# Altium PCB COF.PcbDoc (part 1 of 5)
Units mm, origin at the board's own origin, x right, y up, seen from the top; angles counter-clockwise.
Board outline 42.1 x 32.68 mm, 2 copper layers (TOP, BOTTOM), stack 0.321 mm thick; 42 components, 54 nets, 189 pads, 156 vias.
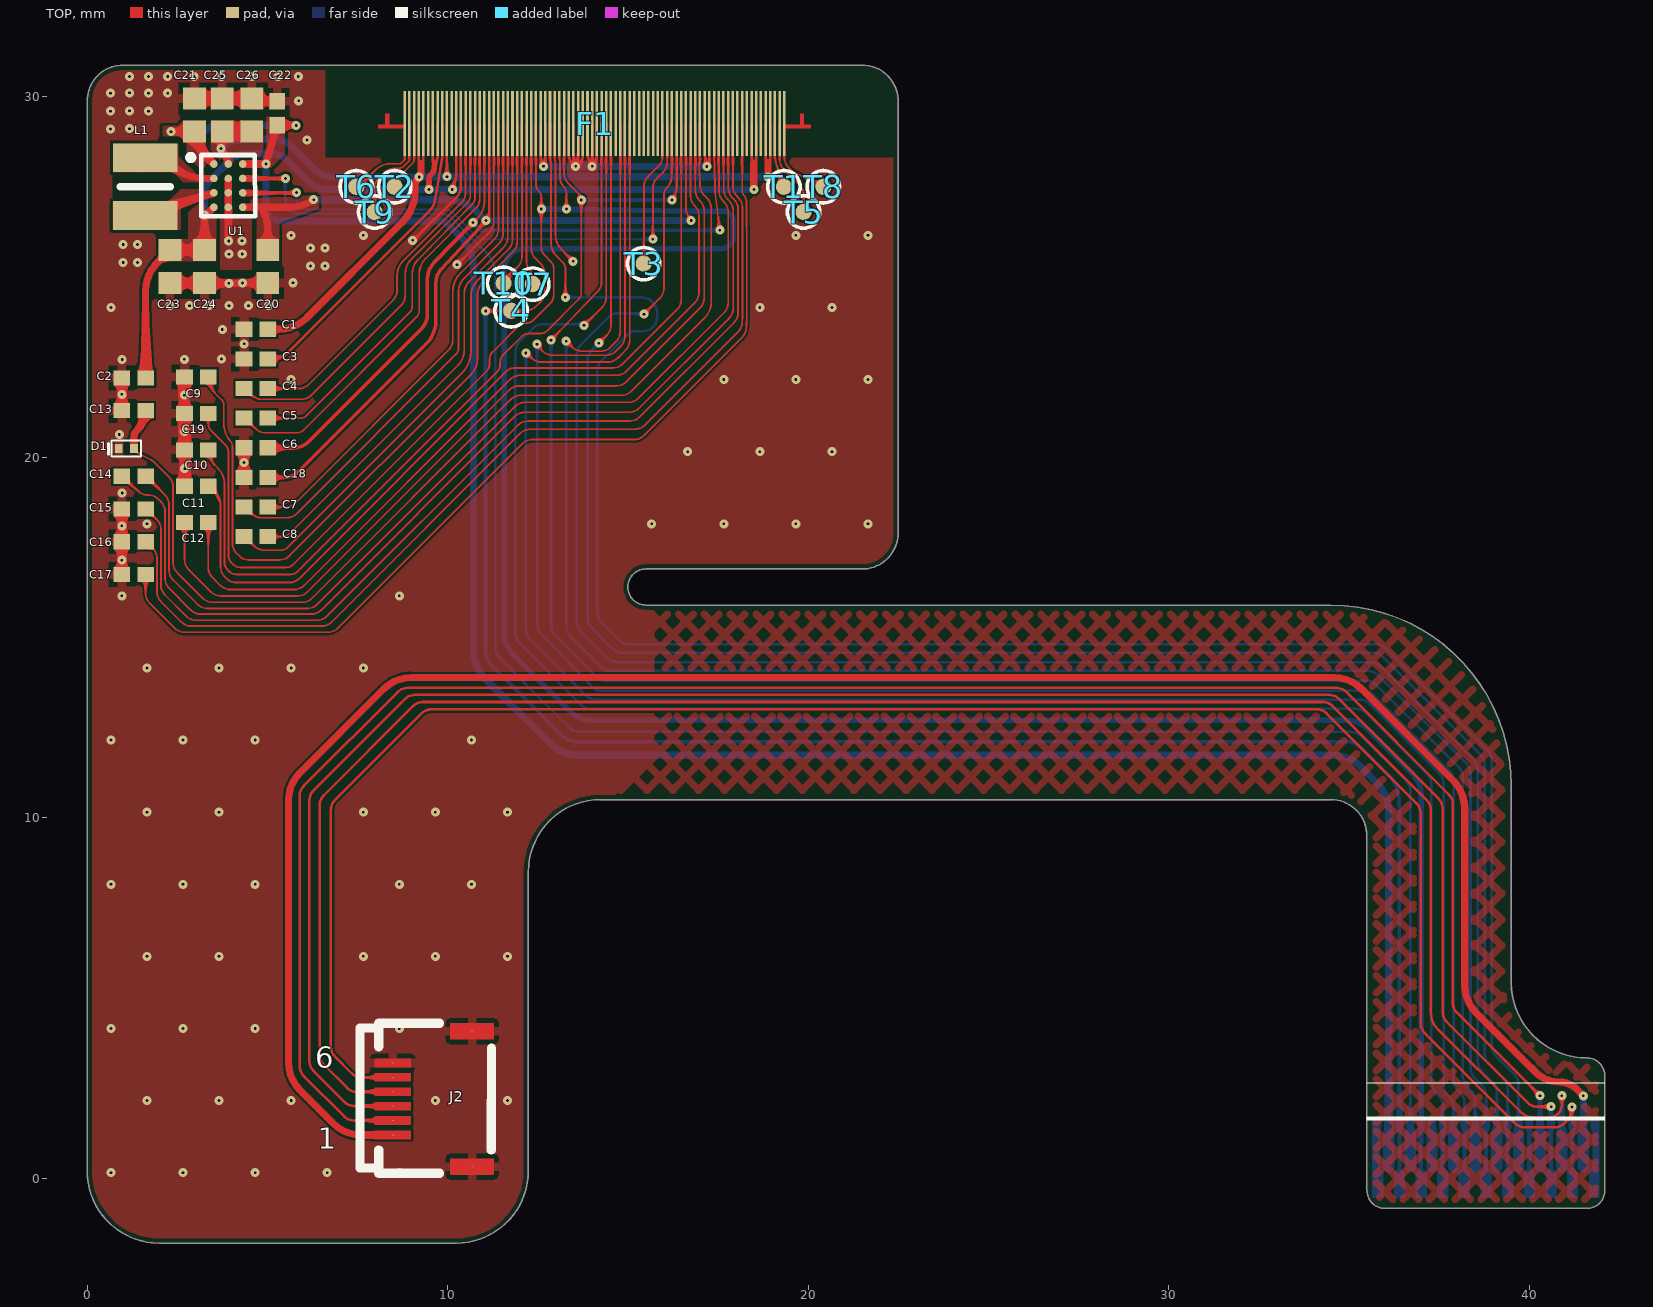
[diagram p0: TOP view]
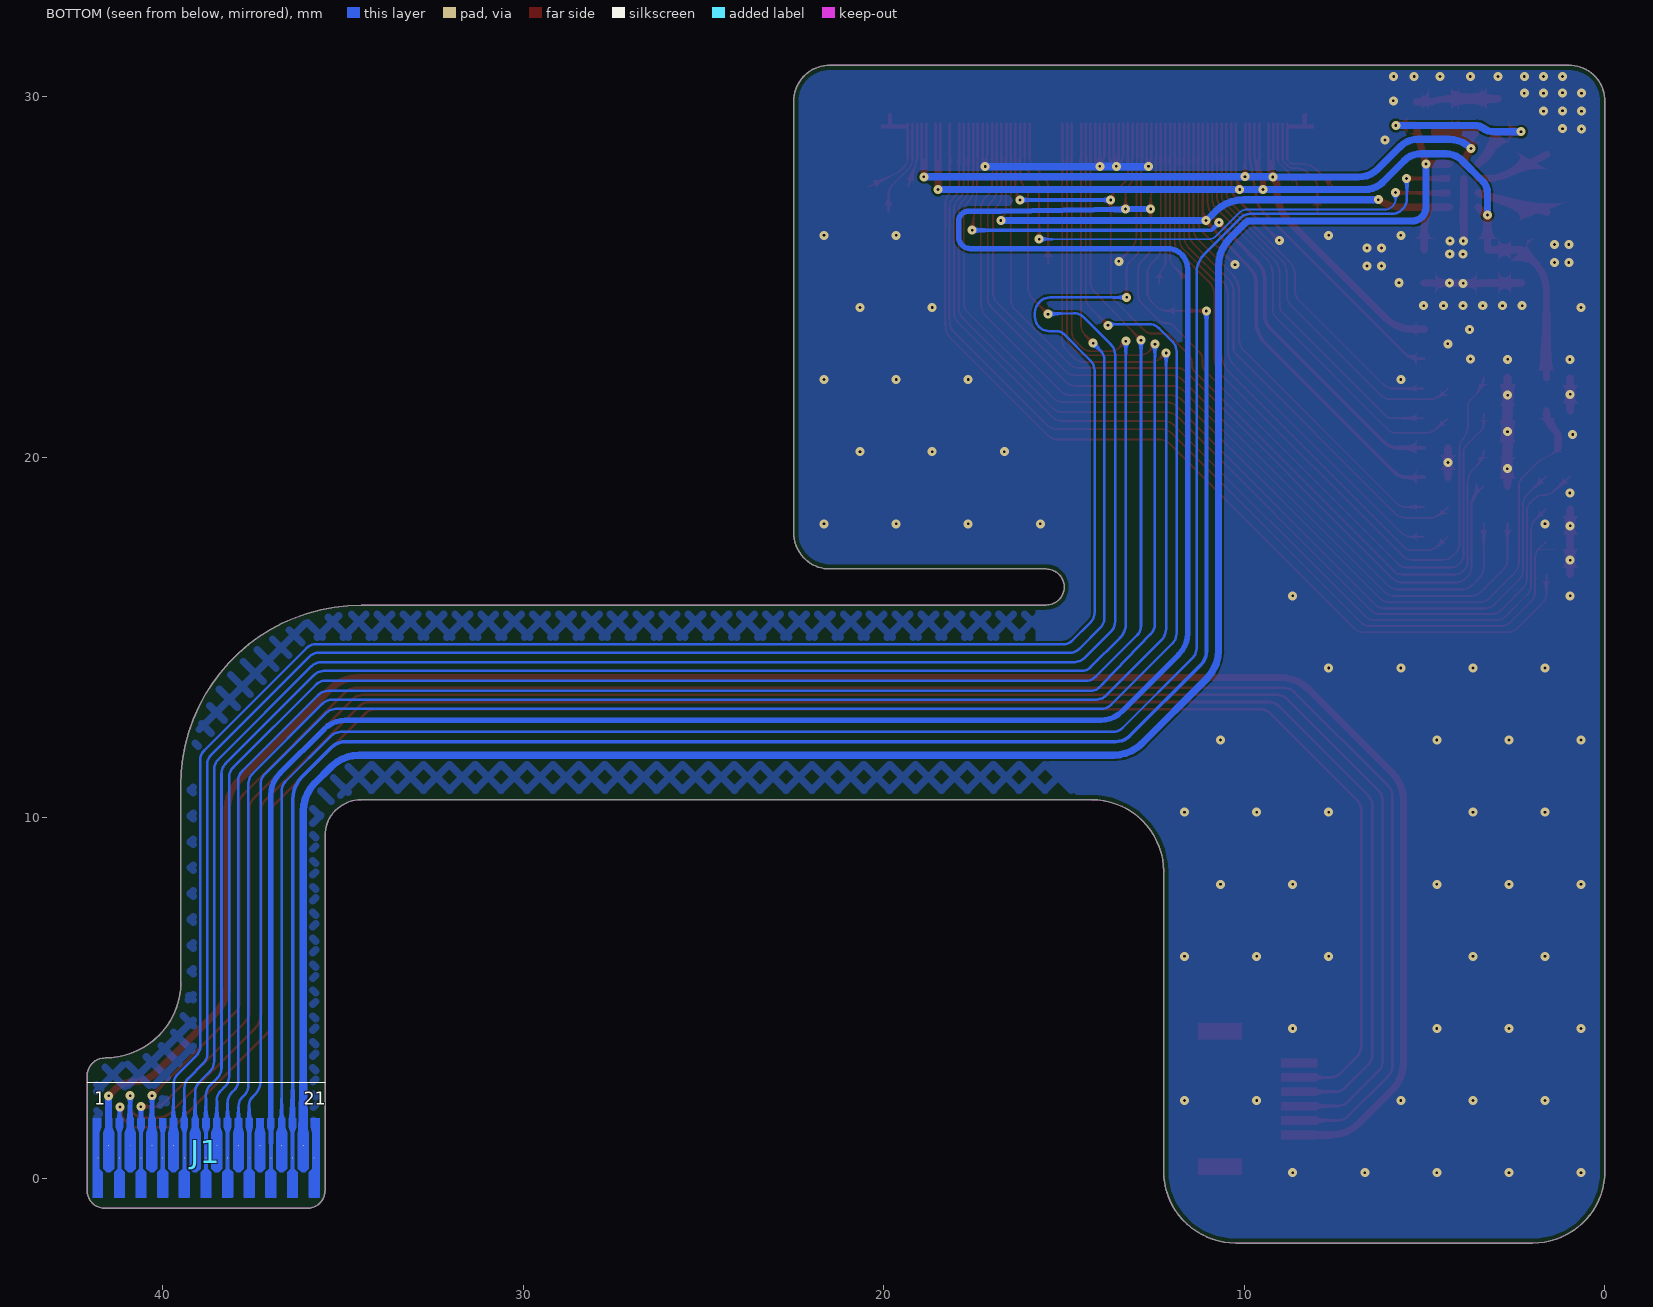
[diagram p1: BOTTOM view, seen from below]
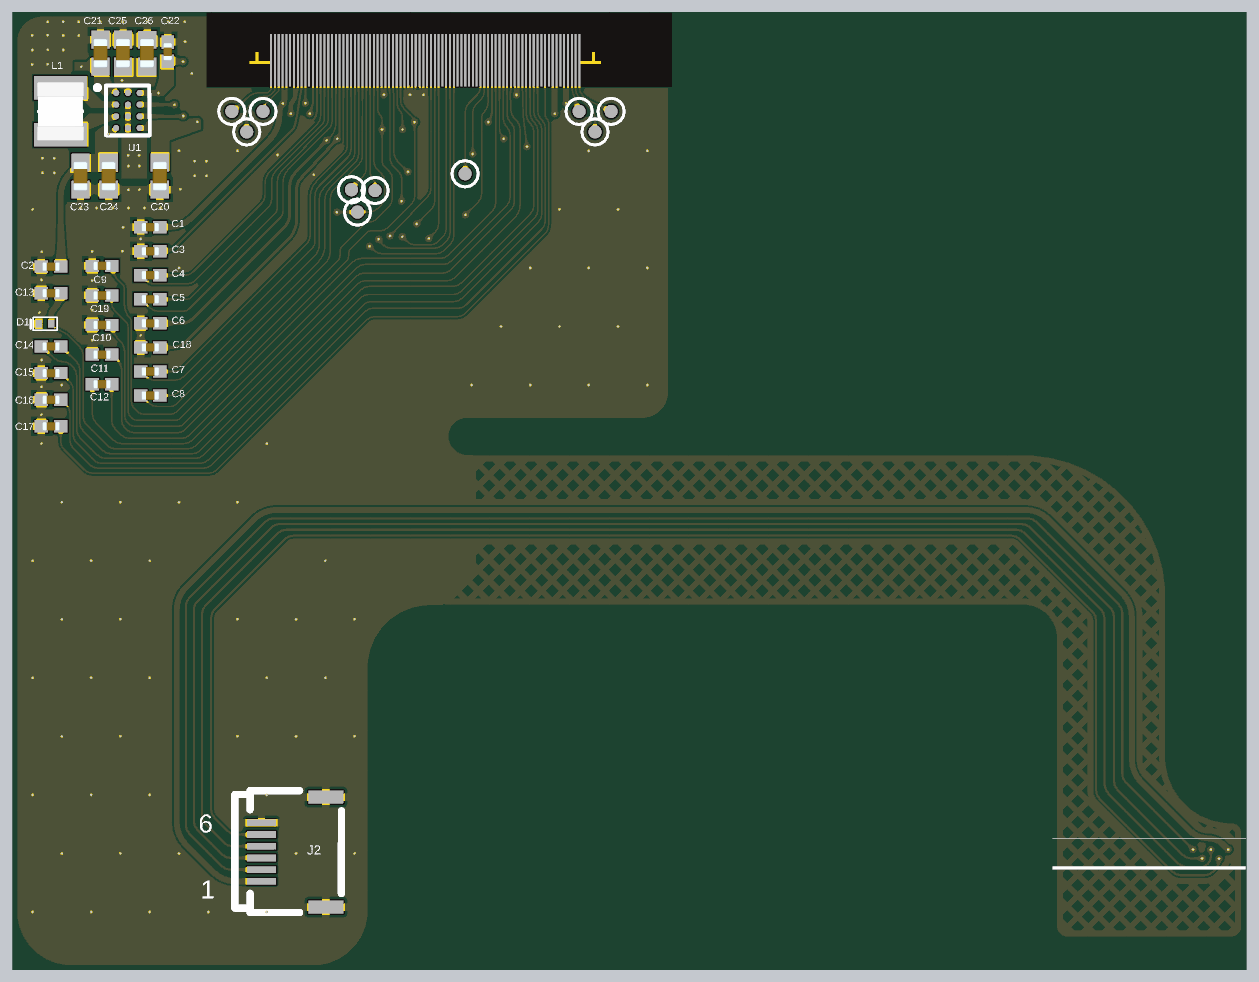
[diagram p5: 3D render of the assembled board from above, using the file's embedded part models]

## Layer stack, top to bottom
Top Stiffener: core 0.1, Core-009, Dk 4.5
Top Coverlay: solder mask 0.05, FC-001, Dk 4
TOP: signal copper 0.035
Adhesive 1: prepreg 0.013, PP-006, Dk 4.1
Polymide: core 0.025, Core-001, Dk 4.1
Adhesive 2: prepreg 0.013, PP-006, Dk 4.1
BOTTOM: signal copper 0.035
Bottom Coverlay: solder mask 0.05, FC-001, Dk 4
Bottom Stiffener: core 0.1, Core-009, Dk 4.5

## Board outline
2,-1.803 10.24,-1.803 ccw(c10.24,0.197) 12.24,0.197 12.24,8.497 cw(c14.24,8.497) 14.24,10.497 34.504,10.497 cw(c34.504,9.497) 35.504,9.497 35.504,-0.341 ccw(c36.004,-0.341) 36.004,-0.841 41.604,-0.841 ccw(c41.604,-0.341) 42.104,-0.341 42.104,2.834 ccw(c41.605,2.834) 41.604,3.334 cw(c41.604,5.434) 39.504,5.434 39.504,10.897 ccw(c34.505,10.897) 34.504,15.897 15.5,15.897 cw(c15.5,16.397) 15.5,16.897 21.5,16.897 ccw(c21.5,17.897) 22.5,17.897 22.5,29.876 ccw(c21.5,29.876) 21.5,30.876 1,30.876 ccw(c1,29.876) 0,29.876 0,0.197 ccw(c2,0.197)

## Design rules (kind name [scope] priority, off if disabled: settings)
BoardOutlineClearance [All] p1: gap=0.127 ignorepadtopadclearanceinfootprint=FALSE
Clearance [All] p1: gap=0.07 ignorepadtopadclearanceinfootprint=TRUE except(0.05: Arc-Region Track-Region SMDPad-Region Via-Region Region-Region; 0.06: Arc-Arc Arc-Track Arc-SMDPad Arc-THPad Arc-Via Arc-Fill Arc-Poly Arc-Text Arc-Hole Track-Track Track-SMDPad Track-THPad Track-Via Track-Fill Track-Poly Track-Text Track-Hole THPad-Region Fill-Region Poly-Region; 0.076: Text-Text Text-Hole)
ComponentClearance [All] p1: gap=0 collisioncheckmode=3 verticalgap=0.254 showdistances=FALSE
DiffPairsRouting [All] p1: maxlimit=0.254 minlimit=0.254 mostfreqgap=0.254 toplayer_minwidth=0.381 toplayer_maxwidth=0.381 toplayer_prefwidth=0.381 bottomlayer_minwidth=0.381 bottomlayer_maxwidth=0.381 bottomlayer_prefwidth=0.381 substack1={169C3359-E97F-47B8-B5D1-FE20E11E3A7F} toplayer_{169c3359-e97f-47b8-b5d1-fe20e11e3a7f}_minwidth=0.381 toplayer_{169c3359-e97f-47b8-b5d1-fe20e11e3a7f}_maxwidth=0.381 toplayer_{169c3359-e97f-47b8-b5d1-fe20e11e3a7f}_prefwidth=0.381 bottomlayer_{169c3359-e97f-47b8-b5d1-fe20e11e3a7f}_minwidth=0.381 bottomlayer_{169c3359-e97f-47b8-b5d1-fe20e11e3a7f}_maxwidth=0.381 bottomlayer_{169c3359-e97f-47b8-b5d1-fe20e11e3a7f}_prefwidth=0.381 substack2={AD35D62E-E976-4F43-AFB7-1F8630225B68} toplayer_{ad35d62e-e976-4f43-afb7-1f8630225b68}_minwidth=0.381 toplayer_{ad35d62e-e976-4f43-afb7-1f8630225b68}_maxwidth=0.381 toplayer_{ad35d62e-e976-4f43-afb7-1f8630225b68}_prefwidth=0.381 bottomlayer_{ad35d62e-e976-4f43-afb7-1f8630225b68}_minwidth=0.381 bottomlayer_{ad35d62e-e976-4f43-afb7-1f8630225b68}_maxwidth=0.381 bottomlayer_{ad35d62e-e976-4f43-afb7-1f8630225b68}_prefwidth=0.381 substack3={7EE685B5-E26D-42BB-97A2-8B5C11376137} toplayer_{7ee685b5-e26d-42bb-97a2-8b5c11376137}_minwidth=0.381 toplayer_{7ee685b5-e26d-42bb-97a2-8b5c11376137}_maxwidth=0.381 toplayer_{7ee685b5-e26d-42bb-97a2-8b5c11376137}_prefwidth=0.381 bottomlayer_{7ee685b5-e26d-42bb-97a2-8b5c11376137}_minwidth=0.381 bottomlayer_{7ee685b5-e26d-42bb-97a2-8b5c11376137}_maxwidth=0.381 bottomlayer_{7ee685b5-e26d-42bb-97a2-8b5c11376137}_prefwidth=0.381 substack4={C0098630-1477-4163-96F2-A121F3601C51} toplayer_{c0098630-1477-4163-96f2-a121f3601c51}_minwidth=0.381 toplayer_{c0098630-1477-4163-96f2-a121f3601c51}_maxwidth=0.381 toplayer_{c0098630-1477-4163-96f2-a121f3601c51}_prefwidth=0.381 bottomlayer_{c0098630-1477-4163-96f2-a121f3601c51}_minwidth=0.381 bottomlayer_{c0098630-1477-4163-96f2-a121f3601c51}_maxwidth=0.381 bottomlayer_{c0098630-1477-4163-96f2-a121f3601c51}_prefwidth=0.381 maxuncoupledlength=12.7
HoleSize [All] p1: absolutevalues=TRUE maxlimit=3.835 minlimit=0.075 maxpercent=80.000 minpercent=20.000
HoleToHoleClearance [All] p1: gap=0.102 allowstackedmicrovias=TRUE
MinimumSolderMaskSliver [All] p1: minsoldermaskwidth=0.025
PlaneConnect [All] p1: planeconnectstyle=Direct reliefexpansion=0.508 reliefentries=4 reliefconductorwidth=0.254 reliefairgap=0.254
PolygonConnect [All] p1: thpad.connectstyle=Relief thpad.reliefconductorwidth=0.254 thpad.reliefentries=4 thpad.polygonreliefangle="90 Angle" thpad.airgapwidth=0.254 smdpad.connectstyle=Relief smdpad.reliefconductorwidth=0.254 smdpad.reliefentries=4 smdpad.polygonreliefangle="90 Angle" smdpad.airgapwidth=0.127 via.connectstyle=Direct via.reliefconductorwidth=0.254 via.reliefentries=4 via.polygonreliefangle="90 Angle" via.airgapwidth=0.254
RoomDefinition FOF [InComponentClass('Room Definition1')] p1: confinementstyle=ConfineIn formatcopy=TRUE lockcomponents=FALSE outline 8.076,28.301 8.076,30.201 20.076,30.201 20.076,28.301
RoutingVias [All] p1: holewidth=0.075 width=0.25 viastyle="Through Hole" minholewidth=0.075 minwidth=0.152 maxholewidth=0.635 maxwidth=1.27
SilkToSilkClearance [All] p1: silktosilkclearance=0
SilkToSolderMaskClearance [IsPad] p1: minsilkscreentomaskgap=0 clearancetoexposedcopper=FALSE
SolderMaskExpansion [All] p1: expansion=0.05 istentingtop=FALSE
UnRoutedNet [All] p1: checkbadconnections=TRUE
Width Width_FOF [WithinRoom('FOF')] p1: maxlimit=0.254 minlimit=0.07 preferedwidth=0.07 substack1={169C3359-E97F-47B8-B5D1-FE20E11E3A7F} substack2={AD35D62E-E976-4F43-AFB7-1F8630225B68} substack3={7EE685B5-E26D-42BB-97A2-8B5C11376137} substack4={C0098630-1477-4163-96F2-A121F3601C51}
Width [All] p2: maxlimit=2 minlimit=0.05 preferedwidth=0.102 substack1={169C3359-E97F-47B8-B5D1-FE20E11E3A7F} substack2={AD35D62E-E976-4F43-AFB7-1F8630225B68} substack3={7EE685B5-E26D-42BB-97A2-8B5C11376137} substack4={C0098630-1477-4163-96F2-A121F3601C51} minimp=50.000000 maximp=50.000000 favimp=50.000000
21 further rules are at their usual default settings.

## Classes and differential pairs
component class COF: C1 C2 C3 C4 C5 C6 C7 C8 C9 C10 C11 C12 C13 C14 C15 C16 C17 C18 C19 C20 C26 D1 F1 J1 J2 L1 T1 T2 T4 T7 T8 T9 U1

## Components (designator, comment, footprint, x,y, rotation, side; value= is the part's Value field where it differs from the comment)
C1 "2.2uF/6.3V" CAPC0603X33N 4.682,23.547 r180 top
C2 "2.2uF/6.3V" CAPC0603X33N 1.293,22.199 r180 top
C3 "1.0uF/6.3V" CAPC0603X33N 4.682,22.725 r180 top
C4 "1.0uF/6.3V" CAPC0603X33N 4.682,21.903 r180 top
C5 "1.0uF/6.3V" CAPC0603X33N 4.682,21.081 r180 top
C6 "2.2uF/10V" CAPC0603X33N 4.682,20.259 r180 top
C7 "1.0uF/10V" CAPC0603X33N 4.682,18.616 r180 top
C8 "1.0uF/10V" CAPC0603X33N 4.682,17.794 r180 top
C9 "2.2uF/10V" CAPC0603X33N 3.033,22.222 r180 top
C10 "1.0uF/6.3V" CAPC0603X33N 3.033,20.202 r180 top
C11 "22nF/6.3V" CAPC0603X33N 3.033,19.192 r180 top
C12 "1.0uF/10V" CAPC0603X33N 3.033,18.182 r180 top
C13 "2.2uF/10V" CAPC0603X33N 1.293,21.289 r180 top
C14 "1.0uF/10V" CAPC0603X33N 1.293,19.47 r180 top
C15 "2.2uF/10V" CAPC0603X33N 1.293,18.561 r180 top
C16 "2.2uF/10V" CAPC0603X33N 1.293,17.651 r180 top
C17 "2.2uF/10V" CAPC0603X33N 1.293,16.742 r180 top
C18 "2.2uF/6.3V" CAPC0603X33N 4.682,19.438 r180 top
C19 "2.2uF/6.3V" CAPC0603X33N 3.033,21.212 r180 top
C20 "10uF/6.3V" CAPC1005X57N 5.01,25.29 r90 top
C21 "10uF/6.3V" CAPC1005X57N 2.982,29.49 r270 top
C22 "100nF/6.3V" CAPC0603X33N 5.277,29.54 r90 top
C23 "10uF/6.3V" CAPC1005X57N 2.297,25.29 r90 top
C24 "10uF/6.3V" CAPC1005X57N 3.258,25.29 r90 top
C25 "10uF/6.3V" CAPC1005X57N 3.749,29.49 r270 top
C26 "10uF/6.3V" CAPC1005X57N 4.571,29.489 r270 top
D1 "LDSR01S30ST5G" DFN0603-D_L0.6-W0.3-P0.34-RD 1.088,20.24 r0 top
F1 "COF" "COF CONNECTOR" 14.076,29.251 r0 top locked
J1 "FPC_Connector" "FPC CONNECTOR" 38.802,0.732 r180 bottom
J2 "OK-F401-06125" FFC-SMD_6P-P0.50_FH34SRJ-6S-0.5SH 9.581,2.197 r90 top
L1 "LQM2MPN2R2NG0L" LQM2MPN1R0NG0L 1.615,27.503 r270 top
T1 "Test_Point" TP-C045-PI 19.331,27.5 r0 top
T2 "Test_Point" TP-C045-PI 8.532,27.5 r0 top
T3 "Test_Point" TP-C045-PI 15.437,25.368 r0 top
T4 "Test_Point" TP-C045-PI 11.761,24.06 r90 top
T5 "Test_Point" TP-C045-PI 19.874,26.8 r0 top
T6 "Test_Point" TP-C045-PI 7.466,27.5 r0 top
T7 "Test_Point" TP-C045-PI 12.362,24.798 r0 top
T8 "Test_Point" TP-C045-PI 20.423,27.5 r0 top
T9 "Test_Point" TP-C045-PI 7.976,26.8 r0 top
T10 "Test_Point" TP-C045-PI 11.555,24.824 r0 top
U1 "BV6810A" WLCSP-12_L1.7-W1.5-R4-C3-P0.40-TL-1 3.917,27.531 r0 top

## Footprints (in the part's own frame and the unit in brackets; to place one, negate y for a bottom-side part, rotate by r counter-clockwise, add the part's x,y. Pads: shape width x height; smd on the part's side, far side on the other; paste and mask are expansions set on the pad)
CAPC0603X33N [mm]
  rect 0.46x0.42 smd: 1(-0.33,0) 2(0.33,0)
  body extent -0.3,-0.15 0.3,0.15, height 0.33
CAPC1005X57N [mm]
  rect 0.61x0.63 smd: 1(-0.46,0) 2(0.46,0)
  body extent -0.5,-0.25 0.5,0.25, height 0.57
"COF CONNECTOR" [mm]
  rect 0.07x1.8 smd: 1(-5.265,0) 2(-5.135,0) 3(-5.005,0) 4(-4.875,0) 5(-4.745,0) 6(-4.615,0) 7(-4.485,0) 8(-4.355,0) 9(-4.225,0) 10(-4.095,0) 11(-3.965,0) 12(-3.835,0) 13(-3.705,0) 14(-3.575,0) 15(-3.445,0) 16(-3.315,0) 17(-3.185,0) 18(-3.055,0) 19(-2.925,0) 20(-2.795,0) 21(-2.665,0) 22(-2.535,0) 23(-2.405,0) 24(-2.275,0) 25(-2.145,0) 26(-2.015,0) 27(-1.885,0) 28(-1.755,0) 29(-1.625,0) 30(-1.495,0) 31(-1.365,0) 32(-1.235,0) 33(-1.105,0) 34(-0.975,0) 35(-0.845,0) 36(-0.715,0) 37(-0.585,0) 38(-0.455,0) 39(-0.325,0) 40(-0.195,0) 41(-0.065,0) 42(0.065,0) 43(0.195,0) 44(0.325,0) 45(0.455,0) 46(0.585,0) 47(0.715,0) 48(0.845,0) 49(0.975,0) 50(1.105,0) 51(1.235,0) 52(1.365,0) 53(1.495,0) 54(1.625,0) 55(1.755,0) 56(1.885,0) 57(2.015,0) 58(2.145,0) 59(2.275,0) 60(2.405,0) 61(2.535,0) 62(2.665,0) 63(2.795,0) 64(2.925,0) 65(3.055,0) 66(3.185,0) 67(3.315,0) 68(3.445,0) 69(3.575,0) 70(3.705,0) 71(3.835,0) 72(3.965,0) 73(4.095,0) 74(4.225,0) 75(4.355,0) 76(4.485,0) 77(4.615,0) 78(4.745,0) 79(4.875,0) 80(5.005,0) 81(5.135,0) 82(5.265,0)
  TOP region: -5.3,-0.125 -5.3,-0.025 -5.7,-0.025 -5.7,0.275 -5.8,0.275 -5.8,-0.025 -6,-0.025 -6,-0.125
  TOP region: 5.3,-0.125 5.3,-0.025 5.7,-0.025 5.7,0.275 5.8,0.275 5.8,-0.025 6,-0.025 6,-0.125
DFN0603-D_L0.6-W0.3-P0.34-RD [mm]
  rect 0.22x0.26 smd paste+0 mask+0.051: 1(-0.21,0) 2(0.21,0)
  silkscreen extent -0.49,-0.22 0.41,0.22
FFC-SMD_6P-P0.50_FH34SRJ-6S-0.5SH [mm]
  round 0.025 smd: 1(-1,1.1) 2(-0.6,1.1) 3(-0.2,1.1) 4(0.2,1.1) 5(0.6,1.1) 6(1,1.1) 7(-1.88,-1.1) 8(1.88,-1.1)
  TOP region: 2.1,-0.5 1.66,-0.5 1.66,-1.7 2.1,-1.7
  TOP region: 1.115,1.6 0.885,1.6 0.885,0.6 1.115,0.6
  TOP region: -0.085,1.6 -0.315,1.6 -0.315,0.6 -0.085,0.6
  TOP region: -0.885,1.6 -1.115,1.6 -1.115,0.6 -0.885,0.6
  TOP region: -0.485,1.6 -0.715,1.6 -0.715,0.6 -0.485,0.6
  TOP region: 0.315,1.6 0.315,0.6 0.085,0.6 0.085,1.6
  TOP region: -1.66,-0.5 -2.1,-0.5 -2.1,-1.7 -1.66,-1.7
  TOP region: 0.715,1.6 0.485,1.6 0.485,0.6 0.715,0.6
  silkscreen extent -2.06,-1.63 2.1,2.01
"FPC CONNECTOR" [mm]
  round 0.025 smd: 1(-3.005,-0.175) 2(-2.705,0.175) 3(-2.405,-0.175) 4(-2.105,0.175) 5(-1.805,-0.175) 6(-1.505,0.175) 7(-1.205,-0.175) 8(-0.905,0.175) 9(-0.605,-0.175) 10(-0.305,0.175) 11(-0.005,-0.175) 12(0.295,0.175) 13(0.595,-0.175) 14(0.895,0.175) 15(1.195,-0.175) 16(1.495,0.175) 17(1.795,-0.175) 18(2.095,0.175) 19(2.395,-0.175) 20(2.695,0.175) 21(2.995,-0.175)
  TOP region: -2.855,-0.475 -2.855,0.525 -2.805,0.675 -2.805,0.925 -2.605,0.925 -2.605,0.675 -2.555,0.525 -2.555,-0.475 -2.655,-0.575 -2.755,-0.575
  TOP region: -3.145,-1.275 -3.145,0.925 -2.915,0.925 -2.915,0.675 -2.965,0.525 -2.965,-0.475 -2.865,-0.575 -2.865,-1.255 -2.868,-1.265 -2.875,-1.272 -2.885,-1.275 -2.885,-1.275
  TOP region: -2.535,-1.275 -2.543,-1.273 -2.549,-1.269 -2.553,-1.263 -2.555,-1.255 -2.555,-1.255 -2.555,-0.575 -2.455,-0.475 -2.455,0.525 -2.505,0.675 -2.505,0.925 -2.305,0.925 -2.305,0.675 -2.355,0.525 -2.355,-0.475 -2.255,-0.575 -2.255,-1.255 -2.258,-1.265 -2.265,-1.272 -2.275,-1.275 -2.275,-1.275
  TOP region: -1.935,-1.275 -1.945,-1.272 -1.952,-1.265 -1.955,-1.255 -1.955,-1.255 -1.955,-0.575 -1.855,-0.475 -1.855,0.525 -1.905,0.675 -1.905,0.925 -1.705,0.925 -1.705,0.675 -1.755,0.525 -1.755,-0.475 -1.655,-0.575 -1.655,-1.255 -1.658,-1.265 -1.665,-1.272 -1.675,-1.275 -1.675,-1.275 -1.675,-1.275
  TOP region: -1.655,-0.475 -1.655,0.525 -1.605,0.675 -1.605,0.925 -1.405,0.925 -1.405,0.675 -1.355,0.525 -1.355,-0.475 -1.455,-0.575 -1.555,-0.575
  TOP region: -1.335,-1.275 -1.343,-1.273 -1.349,-1.269 -1.353,-1.263 -1.355,-1.255 -1.355,-1.255 -1.355,-0.575 -1.255,-0.475 -1.255,0.525 -1.305,0.675 -1.305,0.925 -1.105,0.925 -1.105,0.675 -1.155,0.525 -1.155,-0.475 -1.055,-0.575 -1.055,-1.255 -1.057,-1.263 -1.061,-1.269 -1.067,-1.273 -1.075,-1.275 -1.075,-1.275
  TOP region: -1.055,-0.475 -1.055,0.525 -1.005,0.675 -1.005,0.925 -0.805,0.925 -0.805,0.675 -0.755,0.525 -0.755,-0.475 -0.855,-0.575 -0.955,-0.575
  TOP region: -0.755,-1.255 -0.753,-1.263 -0.749,-1.269 -0.743,-1.273 -0.735,-1.275 -0.735,-1.275 -0.475,-1.275 -0.467,-1.273 -0.461,-1.269 -0.457,-1.263 -0.455,-1.255 -0.455,-1.255 -0.455,-0.575 -0.555,-0.475 -0.555,0.525 -0.505,0.675 -0.505,0.925 -0.705,0.925 -0.705,0.675 -0.655,0.525 -0.655,-0.475 -0.755,-0.575
  TOP region: -0.455,-0.475 -0.455,0.525 -0.405,0.675 -0.405,0.925 -0.205,0.925 -0.205,0.675 -0.155,0.525 -0.155,-0.475 -0.255,-0.575 -0.355,-0.575
  TOP region: -0.155,-1.255 -0.152,-1.265 -0.145,-1.272 -0.135,-1.275 -0.135,-1.275 0.125,-1.275 0.135,-1.272 0.142,-1.265 0.145,-1.255 0.145,-1.255 0.145,-0.575 0.045,-0.475 0.045,0.525 0.095,0.675 0.095,0.925 -0.105,0.925 -0.105,0.675 -0.055,0.525 -0.055,-0.475 -0.155,-0.575
  TOP region: 0.145,-0.475 0.145,0.525 0.195,0.675 0.195,0.925 0.395,0.925 0.395,0.675 0.445,0.525 0.445,-0.475 0.345,-0.575 0.245,-0.575
  TOP region: 0.445,-1.255 0.445,-0.575 0.545,-0.475 0.545,0.525 0.495,0.675 0.495,0.925 0.695,0.925 0.695,0.675 0.645,0.525 0.645,-0.475 0.745,-0.575 0.745,-1.255 0.743,-1.263 0.739,-1.269 0.733,-1.273 0.725,-1.275 0.725,-1.275 0.465,-1.275 0.457,-1.273 0.451,-1.269 0.447,-1.263 0.445,-1.255
  TOP region: 0.745,-0.475 0.745,0.525 0.795,0.675 0.795,0.925 0.995,0.925 0.995,0.675 1.045,0.525 1.045,-0.475 0.945,-0.575 0.845,-0.575
  TOP region: 1.045,-1.255 1.047,-1.263 1.051,-1.269 1.057,-1.273 1.065,-1.275 1.065,-1.275 1.325,-1.275 1.333,-1.273 1.339,-1.269 1.343,-1.263 1.345,-1.255 1.345,-1.255 1.345,-0.575 1.245,-0.475 1.245,0.525 1.295,0.675 1.295,0.925 1.095,0.925 1.095,0.675 1.145,0.525 1.145,-0.475 1.045,-0.575
  TOP region: 1.345,-0.475 1.345,0.525 1.395,0.675 1.395,0.925 1.595,0.925 1.595,0.675 1.645,0.525 1.645,-0.475 1.545,-0.575 1.445,-0.575
  TOP region: 1.645,-1.255 1.648,-1.265 1.655,-1.272 1.665,-1.275 1.665,-1.275 1.925,-1.275 1.935,-1.272 1.942,-1.265 1.945,-1.255 1.945,-1.255 1.945,-0.575 1.845,-0.475 1.845,0.525 1.895,0.675 1.895,0.925 1.695,0.925 1.695,0.675 1.745,0.525 1.745,-0.475 1.645,-0.575
  TOP region: 1.945,-0.475 1.945,0.525 1.995,0.675 1.995,0.925 2.195,0.925 2.195,0.675 2.245,0.525 2.245,-0.475 2.145,-0.575 2.045,-0.575
  TOP region: 2.245,-1.255 2.248,-1.265 2.255,-1.272 2.265,-1.275 2.265,-1.275 2.525,-1.275 2.533,-1.273 2.539,-1.269 2.543,-1.263 2.545,-1.255 2.545,-1.255 2.545,-0.575 2.445,-0.475 2.445,0.525 2.495,0.675 2.495,0.925 2.295,0.925 2.295,0.675 2.345,0.525 2.345,-0.475 2.245,-0.575
  TOP region: 2.545,-0.475 2.545,0.525 2.595,0.675 2.595,0.925 2.795,0.925 2.795,0.675 2.845,0.525 2.845,-0.475 2.745,-0.575 2.645,-0.575
  TOP region: 2.845,-1.255 2.847,-1.263 2.851,-1.269 2.857,-1.273 2.865,-1.275 2.865,-1.275 3.125,-1.275 3.133,-1.273 3.139,-1.269 3.143,-1.263 3.145,-1.255 3.145,-1.255 3.145,0.925 2.895,0.925 2.895,0.675 2.945,0.525 2.945,-0.475 2.845,-0.575
  TOP region: -2.255,-0.475 -2.255,0.525 -2.205,0.675 -2.205,0.925 -2.005,0.925 -2.005,0.675 -1.955,0.525 -1.955,-0.475 -2.055,-0.575 -2.155,-0.575
LQM2MPN1R0NG0L [mm]
  rect 0.8x1.8 smd: 1(-0.8,0) 2(0.8,0)
  silkscreen extent 0,-0.7 0,0.7, body extent -1,-0.8 1,0.8, height 0.9
TP-C045-PI [mm] "TP-C045-PI"
  round 0.45 smd: 1(0,0)
  silkscreen extent -0.45,-0.45 0.45,0.45
WLCSP-12_L1.7-W1.5-R4-C3-P0.40-TL-1 [mm]
  round 0.21 smd paste+0 mask+0.051: A1(-0.4,0.6) A2(0,0.6) A3(0.4,0.6) B1(-0.4,0.2) B2(0,0.2) B3(0.4,0.2) C1(-0.4,-0.2) C2(0,-0.2) C3(0.4,-0.2) D1(-0.4,-0.6) D2(0,-0.6) D3(0.4,-0.6)
  silkscreen extent -1.11,-0.85 0.75,0.85

## Part data
C1 C2 C3 C4 C5 C6 C7 C8 C9 C10 C11 C12 C13 C14 C15 C16 C17 C18 C19 C20 C21 C22 C23 C24 C25 C26: library part Capacitor, "NONE", Capacitance=1uF, Case Code (Imperial)=0201, Case Code (Metric)=0603, Dielectric=X5R, Manufacturer=Murata, Manufacturer Part Number=GRM033R61A105ME15D, Max Operating Temperature=85°C, Min Operating Temperature=-55°C, Tolerance=20%, Voltage Rating=10V, AMBIQ PN=GRM033R61A105ME15D, Case/Package=0201, Category="Ceramic Capacitors", ComponentLink1Description=http://search.murata.co.jp/Ceramy/image/img/A01X/G101/ENG/GRM033R61A105ME15-01.pdf?src-supplier=Digi-Key, ComponentLink1URL=http://search.murata.co.jp/Ceramy/image/img/A01X/G101/ENG/GRM033R61A105ME15-01.pdf?src-supplier=Digi-Key, Length=0.024inch, Mount="Surface Mount", Packaging="Tape and Reel", Pricing 1="1=0.35440, 10=0.26860, 25=0.26600, 50=0.24050, 100=0.18220, 250=0.18020, 500=0.17800, 1000=0.12040, 3000=0.11920, 6000=0.08160,", RoHS=Yes, RoHS Compliant=Yes, Stock 1=387591, Supplier 1="Arrow Electronics", Supplier Part Number 1=GRM033R61A105ME15D, Thickness=0.015inch, Voltage Rating (DC)=10V, Width=0.012inch
D1: Average Rectified Current (Io)=0.1A, Forward Voltage (Vf@If)=0.62V, JLCPCB Part Class="Extended Part", LCSC Part Name="电压:30V 电流:100mA", Manufacturer=LRC(乐山无线电), Reverse Leakage Current (Ir)=0.35uA, Reverse Voltage (Vr)=30V, Add into BOM=yes, Convert to PCB=yes, Datasheet=https://atta.szlcsc.com/upload/public/pdf/source/20190402/C383209_E6CC6AB1DDDAFF419D608D9457880F70.pdf, Device=LDSR01S30ST5G, Manufacturer Part=LDSR01S30ST5G, Supplier=LCSC, Supplier Footprint=DFN0603, Supplier Part=C383209, Symbol=LDSR01S30ST5G
J1: library part 21Pin_Connector
L1: "Inductor", Manufacturer_Name="Murata Electronics", Mouser Part Number=81-LQM2MPN2R2NG0L, Arrow Part Number=LQM2MPN2R2NG0L, Arrow Price/Stock=https://www.arrow.com/en/products/lqm2mpn2r2ng0l/murata-manufacturing?region=nac, Datasheet Link=https://psearch.en.murata.com/inductor/product/LQM2MPN2R2NG0%23.html, Height=1mm, Manufacturer_Part_Number=LQM2MPN2R2NG0L, Mouser Price/Stock=https://www.mouser.co.uk/ProductDetail/Murata-Electronics/LQM2MPN2R2NG0L?qs=%2F%252BYoplLUB5hok3HfggX2sA%3D%3D

## Via types
v1: diameter 0.25, hole 0.075, TOP to BOTTOM, tented both sides, 156 vias

## Nets (pads, with @x,y where several pads share a name; then routed paths per layer and width w, separated by ;. In a path a pad name is that pad's centre, name@x,y a point inside that pad or via, vN(x,y) a via of type N, cw(c..) or ccw(c..) an arc to the next point about the centre after c; other vN are vias at no path point)
AVDD: C6.1 F1.18 F1.67 | length 21.8
  TOP w0.05: v1@10.71,26.504 10.825,26.62 ccw(c10.351,27.093) 10.867,26.666 ccw(c10.351,27.093) 11.021,27.093 11.021,28.301 ; 17.391,28.301 17.401,28.158 cw(c17.016,28.134) 17.401,28.144 17.421,27.366 ccw(c17.916,27.379) 17.425,27.318 v1(17.552,26.295)
  TOP w0.07: 11.021,28.301 F1.18@11.021,29.251 ; 17.391,28.301 F1.67@17.391,29.251
  TOP w0.1: C6.1@5.012,20.259 5.745,20.259 ccw(c5.745,20.809) 6.133,20.42 9.28,23.567 ccw(c8.89,23.955) 9.44,23.955 9.44,24.94 cw(c10.094,24.942) 9.626,25.399 v1(10.705,26.509)
  BOTTOM w0.1: v1(10.705,26.509) 10.705,26.504 10.913,26.295 11.141,26.295 v1(17.552,26.295)
C11N: C4.2 F1.15 | length 11.3
  TOP w0.05: C4.2@4.352,21.903 4.557,21.718 4.56,21.716 ccw(c4.827,21.993) 4.715,21.625 4.758,21.612 ccw(c4.782,21.693) 4.782,21.608 5.949,21.608 ccw(c5.949,21.993) 6.22,21.72 8.712,24.212 ccw(c8.44,24.484) 8.825,24.484 8.825,25.093 cw(c9.387,25.093) 8.988,25.49 10.549,27.051 ccw(c10.349,27.25) 10.631,27.25 10.631,28.301
  TOP w0.07: 10.631,28.301 F1.15@10.631,29.251
C11P: C4.1 F1.14 | length 10.1
  TOP w0.05: C4.1@5.012,21.903 5.873,21.903 ccw(c5.873,22.288) 6.144,22.015 8.489,24.36 ccw(c8.216,24.631) 8.601,24.631 8.601,25.041 cw(c9.177,25.042) 8.769,25.449 10.389,27.069 ccw(c10.116,27.34) 10.501,27.34 10.501,28.301
  TOP w0.07: 10.501,28.301 F1.14@10.501,29.251
C12N: C5.2 F1.17 | length 12.3
  TOP w0.05: C5.2@4.352,21.081 4.557,20.896 4.694,20.773 ccw(c4.952,21.059) 4.952,20.674 5.815,20.674 ccw(c5.815,20.949) 6.009,20.754 9.136,23.881 ccw(c8.941,24.075) 9.216,24.074 9.216,25.085 cw(c9.818,25.085) 9.216,25.087 cw(c9.818,25.085) 9.392,25.51 10.794,26.913 ccw(c10.555,27.149) 10.891,27.149 10.891,28.301
  TOP w0.07: 10.891,28.301 F1.17@10.891,29.251
C12P: C5.1 F1.16 | length 11.1
  TOP w0.05: C5.1@5.012,21.081 5.922,21.081 ccw(c5.922,21.312) 6.085,21.149 8.939,24.003 ccw(c8.744,24.197) 9.019,24.197 9.019,25.083 cw(c9.582,25.084) 9.179,25.477 10.684,27.017 ccw(c10.486,27.209) 10.761,27.209 10.761,28.301
  TOP w0.07: 10.761,28.301 F1.16@10.761,29.251
C31N: C7.2 F1.22 | length 14.7
  TOP w0.05: C7.2@4.352,18.616 4.557,18.431 4.569,18.42 ccw(c4.827,18.706) 4.715,18.337 4.758,18.324 ccw(c4.782,18.406) 4.782,18.321 5.543,18.321 ccw(c5.543,18.706) 5.815,18.433 10.232,22.851 ccw(c10.055,23.029) 10.306,23.029 10.306,24.598 cw(c10.824,24.598) 10.458,24.964 11.429,25.935 ccw(c11.156,26.207) 11.541,26.207 11.541,28.301
  TOP w0.07: 11.541,28.301 11.541,28.963 F1.22@11.541,29.251
C31P: C7.1 F1.21 | length 13.6
  TOP w0.05: C7.1@5.012,18.616 5.512,18.616 ccw(c5.512,19.001) 5.784,18.728 10.029,22.974 ccw(c9.757,23.246) 10.142,23.246 10.142,24.578 cw(c10.891,24.579) 10.361,25.108 11.299,26.045 ccw(c11.026,26.317) 11.411,26.317 11.411,28.301
  TOP w0.07: 11.411,28.301 11.411,28.386 F1.21@11.411,29.251
C32N: C8.2 F1.24 | length 15.6
  TOP w0.05: C8.2@4.352,17.794 4.557,17.609 4.658,17.518 ccw(c4.916,17.804) 4.916,17.419 5.389,17.419 ccw(c5.389,17.644) 5.548,17.484 10.409,22.345 ccw(c9.834,22.92) 10.647,22.92 10.647,24.469 cw(c11.249,24.469) 10.823,24.895 11.688,25.76 ccw(c11.416,26.032) 11.801,26.032 11.801,28.301
  TOP w0.07: 11.801,28.301 11.801,28.386 F1.24@11.801,29.251
C32P: C8.1 F1.23 | length 14.4
  TOP w0.05: C8.1@5.012,17.794 5.372,17.794 ccw(c5.372,18.179) 5.643,17.905 10.289,22.551 ccw(c9.876,22.964) 10.46,22.964 10.46,24.539 cw(c10.916,24.539) 10.594,24.862 11.559,25.827 ccw(c11.286,26.099) 11.671,26.099 11.671,28.301
  TOP w0.07: 11.671,28.301 11.671,28.386 F1.23@11.671,29.251
C41N: C14.2 F1.69 | length 28.5
  TOP w0.05: C14.2@0.963,19.47 1.168,19.285 1.431,19.048 ccw(c1.689,19.333) 1.689,18.949 1.703,18.949 cw(c1.703,18.564) 1.975,18.837 2.052,18.76 cw(c1.778,18.489) 2.163,18.489 2.163,16.633 ccw(c2.548,16.633) 2.275,16.362 2.88,15.757 ccw(c3.151,16.03) 3.151,15.646 6.22,15.646 ccw(c6.22,16.03) 6.492,15.757 11.867,21.133 cw(c12.139,20.86) 12.139,21.245 15.038,21.245 ccw(c15.038,21.63) 15.309,21.357 17.81,23.858 ccw(c17.538,24.13) 17.922,24.13 17.922,26.839 ccw(c17.538,26.839) 17.816,27.105 17.767,27.156 cw(c18.045,27.422) 17.661,27.418 17.652,28.301
  TOP w0.07: F1.69@17.651,29.251 17.651,28.386 17.651,28.351 ccw(c18.006,28.351) 17.651,28.348 17.652,28.301
C41P: C14.1 F1.68 | length 27.5
  TOP w0.05: C14.1@1.623,19.47 1.828,19.285 2.16,18.953 cw(c1.888,18.681) 2.273,18.681 2.273,16.864 ccw(c2.658,16.864) 2.385,16.593 3.063,15.915 ccw(c3.335,16.188) 3.335,15.803 6.115,15.803 ccw(c6.115,16.188) 6.387,15.915 11.881,21.409 cw(c12.152,21.136) 12.152,21.521 15.023,21.521 ccw(c15.023,21.906) 15.295,21.633 17.673,24.012 ccw(c17.401,24.284) 17.786,24.284 17.786,26.803 ccw(c17.401,26.803) 17.68,27.068 17.637,27.114 cw(c17.916,27.379) 17.531,27.375 17.522,28.301
  TOP w0.07: 17.522,28.301 17.521,28.351 ; 17.521,28.351 F1.68@17.521,29.251
C51N: C12.2 F1.63 | length 24.3
  TOP w0.05: C12.2@2.703,18.182 2.703,17.153 ccw(c3.088,17.153) 2.815,16.881 3.433,16.264 ccw(c3.704,16.537) 3.704,16.152 5.843,16.152 ccw(c5.843,16.537) 6.115,16.264 11.714,21.863 cw(c11.985,21.59) 11.985,21.975 14.68,21.975 ccw(c14.68,22.36) 14.952,22.088 17.006,24.142 ccw(c16.734,24.414) 17.119,24.414 17.119,26.832 ccw(c16.734,26.832) 17.006,27.104 16.983,27.127 cw(c17.256,27.398) 16.871,27.398 16.871,28.301
  TOP w0.07: 16.871,28.301 F1.63@16.871,29.251
C51P: C12.1 F1.62 | length 23.4
  TOP w0.05: C12.1@3.363,18.182 3.363,16.935 ccw(c3.748,16.935) 3.475,16.663 3.699,16.44 ccw(c3.97,16.713) 3.97,16.328 5.749,16.328 ccw(c5.749,16.713) 6.02,16.44 11.74,22.159 cw(c12.011,21.886) 12.011,22.271 14.688,22.271 ccw(c14.688,22.656) 14.961,22.384 16.861,24.284 ccw(c16.588,24.556) 16.973,24.556 16.973,26.695 ccw(c16.588,26.695) 16.861,26.967 16.853,26.975 cw(c17.126,27.246) 16.741,27.246 16.741,28.301
  TOP w0.07: 16.741,28.301 F1.62@16.741,29.251
ELVDD: C2.1 C23.2 C24.2 F1.7 F1.8 F1.12 F1.75 F1.76 U1.D1 | length 30.7
  TOP w0.07: F1.7@9.591,29.251 9.591,28.183 9.639,28.183 9.686,28.183 9.696,28.172 9.719,28.301 9.72,28.307 ccw(c9.651,28.319) 9.721,28.319 F1.8@9.721,29.251 ; v1(10.132,27.424) 10.225,27.731 ccw(c9.856,27.843) 10.241,27.843 10.241,28.301 10.241,28.386 F1.12@10.241,29.251 ; F1.75@18.431,29.251 18.431,28.159 18.496,28.159 18.561,28.159 F1.76@18.561,29.251
  TOP w0.15: v1(9.483,27.424) 9.483,27.684 cw(c9.716,27.684) 9.551,27.849 ccw(c9.445,27.955) 9.564,27.865 ccw(c9.415,28.014) 9.605,27.921 ccw(c9.47,27.987) 9.61,27.932 9.615,27.946 9.626,28.009 9.639,28.183
  TOP w0.2: C2.1@1.623,22.199 1.623,24.613 cw(c2.723,24.613) 1.867,25.304 1.898,25.341 cw(c2.753,24.65) 1.945,25.397 2.082,25.545 2.287,25.75 C24.2@3.258,25.75 v1@3.258,26.67 ; v1(3.258,26.719) v1@3.258,26.67 ; U1.D1@3.517,26.931 3.283,26.695 v1@3.258,26.67 ; v1@18.495,27.425 18.495,28.159
  BOTTOM w0.2: v1(3.258,26.719) 3.258,27.329 ; 3.258,27.33 cw(c3.727,27.33) 3.396,27.661 3.969,28.234 cw(c4.402,27.802) 4.402,28.414 5.108,28.414 cw(c5.108,27.768) 5.564,28.225 ; 5.564,28.225 5.599,28.19 6.156,27.633 ccw(c6.663,28.139) 6.663,27.423 v1@9.483,27.423
  BOTTOM w0.203: v1(9.483,27.424) v1(10.132,27.424) ; v1@10.133,27.423 v1@18.498,27.423
  other v1: 18.498,27.422
ELVSS: C1.1 C25.2 C26.2 F1.4 F1.5 F1.10 F1.78 F1.79 U1.A2 | length 30.6
  TOP w0.07: F1.4@9.201,29.251 9.201,28.139 9.266,28.139 9.331,28.139 F1.5@9.331,29.251 ; v1@9.981,27.796 F1.10@9.981,29.251 ; F1.78@18.821,29.251 18.821,28.171 18.885,28.171 18.951,28.171 F1.79@18.951,29.251
  TOP w0.2: C25.2@3.749,29.03 3.714,28.995 v1(3.714,28.56) cw(c2.845,27.886) U1.A2@3.917,28.132 ; C1.1@5.012,23.547 5.319,23.547 ccw(c5.319,24.647) 6.097,23.869 8.694,26.467 8.746,26.518 ccw(c7.907,27.357) 9.093,27.357 9.093,27.485 cw(c9.498,27.485) v1(9.212,27.772) ccw(c9.085,27.899) 9.264,27.899 9.264,28.137 9.266,28.139 ; v1@18.885,27.783 18.885,28.171
  TOP w0.5: C25.2@3.749,29.03 C26.2@4.571,29.029
  BOTTOM w0.2: v1(3.714,28.56) cw(c4.334,27.94) 3.724,28.57 cw(c4.334,27.94) 3.812,28.645 cw(c4.334,27.94) 4.334,28.817 5.185,28.817 cw(c5.185,28.115) 5.68,28.612 cw(c5.185,28.115) 5.681,28.611 6.3,27.992 ccw(c6.832,28.525) 6.833,27.772 v1(9.212,27.772)
  BOTTOM w0.203: v1(9.212,27.772) cw(c9.311,26.659) 9.311,27.776 v1@9.977,27.776 ; v1@9.985,27.777 v1(18.892,27.777)
  other v1: 9.982,27.781
ERR_Flag: F1.56 T3.1 | length 4.1
  TOP w0.05: T3.1@15.437,25.368 ccw(c15.06,25.449) 15.445,25.449 15.445,27.502 cw(c15.83,27.502) 15.557,27.773 15.849,28.065 ccw(c15.576,28.337) 15.955,28.266 15.961,28.301
  TOP w0.07: 15.961,28.301 F1.56@15.961,29.251
FOF_R: F1.80 T1.1 | length 1.8
  TOP w0.05: 19.081,28.301 19.112,28.156 ccw(c19.596,28.26) 19.128,28.101 T1.1@19.331,27.5
  TOP w0.07: 19.081,28.301 F1.80@19.081,29.251
FOF_R1: F1.82 T8.1 | length 2.4
  TOP w0.05: 19.341,28.301 19.342,28.288 ccw(c19.726,28.314) 19.453,28.043 19.535,27.961 ccw(c19.807,28.234) 19.635,27.889 T8.1@20.423,27.5
  TOP w0.07: 19.341,28.301 F1.82@19.341,29.251
FOF_R2: F1.81 T5.1 | length 2.7
  TOP w0.05: 19.211,28.301 19.211,28.26 ccw(c19.596,28.26) 19.323,27.989 19.762,27.55 cw(c19.489,27.278) 19.874,27.278 T5.1@19.874,26.8
  TOP w0.07: 19.211,28.301 F1.81@19.211,29.251
FOG_L: F1.3 T2.1 | length 2
  TOP w0.05: T2.1@8.532,27.5 cw(c8.912,27.5) 8.609,27.728 cw(c8.912,27.5) 8.643,27.768 9.034,28.159 ccw(c8.944,28.249) 9.071,28.249 9.071,28.301
  TOP w0.07: 9.071,28.301 9.071,28.312 F1.3@9.071,29.251
FOG_L1: F1.1 T6.1 | length 2.6
  TOP w0.05: T6.1@7.466,27.5 7.529,27.5 7.99,27.961 cw(c8.423,27.529) 8.423,28.14 8.676,28.14 ccw(c8.676,28.19) 8.685,28.141 8.694,28.143 ccw(c8.686,28.192) 8.721,28.157 8.811,28.247 8.811,28.301
  TOP w0.07: 8.811,28.301 F1.1@8.811,29.251
FOG_L2: F1.2 T9.1 | length 3
  TOP w0.05: T9.1@7.976,26.8 7.976,27.492 cw(c8.281,27.492) 8.065,27.708 8.243,27.886 cw(c8.553,27.577) 8.553,28.015 8.644,28.015 ccw(c8.644,28.232) 8.798,28.078 8.922,28.202 ccw(c8.876,28.249) 8.941,28.249 8.941,28.301
  TOP w0.07: 8.941,28.301 F1.2@8.941,29.251
GND: C1.2 C2.2 C3.2 C6.2 C9.2 C10.2 C11.2 C13.2 C15.2 C16.2 C17.2 C18.2 C19.2 C20.1 C21.1 C22.2 C23.1 C24.1 C25.1 C26.1 D1.1 F1.13 F1.20 F1.30 F1.31 F1.33 F1.36 F1.37 F1.38 F1.39 F1.40 F1.41 F1.42 F1.65 F1.66 J1.1 J1.7 J1.21 J2.6 J2.7 J2.8 U1.B2 U1.C2 U1.D2 | length 43.5
  TOP w0.05: v1(10.262,25.34) 11.169,26.247 ccw(c10.896,26.519) 11.281,26.519 11.281,28.301 ; 12.971,28.301 12.991,28.131 cw(c12.608,28.088) 12.992,28.118 12.992,26.174 ccw(c13.589,26.174) 13.167,25.752 v1(13.486,25.433)
  TOP w0.07: v1(9.032,26.013) ccw(c8.841,26.347) 9.113,26.075 10.259,27.22 ccw(c9.986,27.493) 10.371,27.493 F1.13@10.371,29.251 ; 11.281,28.301 F1.20@11.281,29.251 ; F1.30@12.581,29.251 12.581,28.301 12.585,28.274 ccw(c12.966,28.329) 12.614,28.174 v1(12.661,28.066) 12.696,28.185 ccw(c12.326,28.293) 12.711,28.293 F1.31@12.711,29.251 ; 12.971,28.301 F1.33@12.971,29.251 ; F1.36@13.361,29.251 13.361,28.386 13.362,28.371 ccw(c13.746,28.4) 13.374,28.301 ccw(c13.746,28.4) 13.433,28.177 v1@13.486,28.101 ; v1@13.491,28.136 F1.37@13.491,29.251 ; v1@13.612,28.062 13.609,28.062 ccw(c13.366,28.361) 13.747,28.301 ccw(c13.366,28.361) 13.751,28.361 F1.39@13.751,29.251 ; v1@13.621,28.139 F1.38@13.621,29.251 ; F1.40@13.881,29.251 13.881,28.386 13.883,28.368 ccw(c14.266,28.406) 13.896,28.301 ccw(c14.266,28.406) 13.956,28.178 cw(c13.644,27.952) v1(14.012,28.066) ; F1.41@14.011,29.251 14.011,28.117 ccw(c14.396,28.117) v1@14.011,28.115 ; F1.42@14.141,29.251 14.141,28.379 cw(c13.756,28.379) 14.133,28.301 cw(c13.756,28.379) 14.072,28.158 v1@14.04,28.113 ; F1.65@17.131,29.251 17.131,28.386 17.145,28.301 v1(17.191,28.064) 17.232,28.16 ccw(c16.876,28.308) 17.261,28.294 17.261,28.301 F1.66@17.261,29.251 ; v1@13.486,28.101 v1(13.555,28.066) ; v1@13.486,28.101 13.467,28.111 13.507,28.071 v1(13.555,28.066) ; v1@13.486,28.101 v1@13.515,28.087 ; v1@13.486,28.101 v1@13.515,28.087 ; v1@13.515,28.087 v1(13.555,28.066) ; v1@13.515,28.087 v1(13.555,28.066) ; v1@14.011,28.115 v1(14.012,28.066) ; v1@14.011,28.115 14.011,28.113 v1(14.012,28.066) ; v1@14.011,28.115 v1(14.012,28.066) ; v1(14.012,28.066) cw(c14.355,27.892) v1@14.04,28.113 ; v1(14.012,28.066) v1@14.04,28.113
  TOP w0.2: C17.2@0.963,16.742 0.963,17.541 0.963,17.625 C15.2@0.963,18.561 ; C13.2@0.963,21.289 C2.2@0.963,22.199 ; C23.1@2.297,24.83 C24.1@3.258,24.83 3.266,24.822 v1(3.932,24.822) 3.936,24.826 4.307,24.826 v1(4.311,24.83) C20.1@5.01,24.83 ; C11.2@2.703,19.192 C9.2@2.703,22.222 ; C21.1@2.964,29.939 4.356,29.939 4.563,29.918 4.786,29.859 C22.2@5.224,29.859 ; U1.B2@3.917,27.731 3.919,27.402 cw(c2.819,27.396) U1.C2@3.917,27.331 ; U1.C2@3.917,27.331 U1.C2@3.917,27.331 ; v1(3.928,25.996) cw(c3.956,26.024) 3.917,26.024 U1.D2@3.917,26.931 U1.C2@3.917,27.331 ; C18.2@4.352,19.438 C6.2@4.352,20.259
  BOTTOM w0.2: v1@12.67,28.058 v1@13.546,28.058 ; v1(13.555,28.066) v1(14.012,28.066) ccw(c14.066,29.165) 14.066,28.065 17.14,28.065 cw(c17.137,26.965) v1@17.191,28.064
  other v1: 0.661,0.152 2.661,0.152 4.661,0.152 6.661,0.152 8.661,0.152 1.661,2.152 3.661,2.152 5.661,2.152 9.661,2.152 11.661,2.152 0.661,4.152 2.661,4.152 4.661,4.152 8.661,4.152 1.661,6.152 3.661,6.152 7.661,6.152 9.661,6.152 11.661,6.152 0.661,8.152 2.661,8.152 4.661,8.152 8.661,8.152 10.661,8.152 1.661,10.152 3.661,10.152 7.661,10.152 9.661,10.152 11.661,10.152 0.661,12.152 2.661,12.152 4.661,12.152 10.661,12.152 1.661,14.152 3.661,14.152 5.661,14.152 7.661,14.152 0.966,16.152 8.661,16.152 0.963,17.142 0.963,18.093 1.661,18.152 15.661,18.152 17.661,18.152 19.661,18.152 21.661,18.152 0.974,19.006 2.706,19.68 4.352,19.848 16.661,20.152 18.661,20.152 20.661,20.152 0.895,20.628 2.703,20.707 2.699,21.717 0.963,21.744 5.661,22.152 17.661,22.152 19.661,22.152 21.661,22.152 0.972,22.706 2.7,22.713 3.731,22.721 4.356,23.143 3.752,23.541 0.661,24.152 18.661,24.152 20.661,24.152 2.297,24.2 2.843,24.2 3.389,24.2 3.935,24.2 4.48,24.2 5.026,24.2 5.711,24.838 6.2,25.3 6.6,25.3 1,25.4 1.4,25.4 3.936,25.632 4.304,25.635 6.2,25.8 6.6,25.8 1,25.9 1.4,25.9 4.3,26 5.661,26.152 7.661,26.152 19.661,26.152 21.661,26.152 6.1,28.8 0.648,29.1 1.177,29.11 0.648,29.598 1.177,29.608 1.706,29.598 5.868,29.883 0.648,30.095 1.177,30.105 1.706,30.095 2.235,30.095 1.177,30.561 1.706,30.561 2.235,30.561 2.967,30.561 3.735,30.561 4.576,30.561 5.292,30.561 5.861,30.561
NetL1_1: L1.1 U1.B1 | length 2
  TOP w0.2: L1.1@1.615,28.394 2.415,28.003 2.74,27.843 ccw(c3.224,28.831) 3.224,27.731 U1.B1@3.517,27.731
NetL1_2: L1.2 U1.C1 | length 2
  TOP w0.2: L1.2@1.615,26.794 L1.2@2.415,27.003 ; L1.2@2.415,27.003 U1.C1@3.517,27.331
QSPI_CSX: F1.45 J1.9 | length 51.8
  TOP w0.05: v1(14.195,23.16) 14.419,23.384 ccw(c14.146,23.655) 14.531,23.655 14.531,28.301
  TOP w0.07: 14.531,28.301 F1.45@14.531,29.251
  BOTTOM w0.07: v1(14.195,23.16) 14.002,22.966 ccw(c14.274,22.694) 13.889,22.694 13.889,15.534 ccw(c14.274,15.534) 14.002,15.262 14.579,14.685 ccw(c14.851,14.957) 14.851,14.572 35.67,14.572 cw(c35.672,14.187) 35.944,14.46 38.658,11.746 cw(c38.386,11.473) 38.771,11.473 38.771,3.452 ccw(c39.156,3.452) 38.883,3.18 39.294,2.77 cw(c39.022,2.497) 39.407,2.497 J1.9@39.407,0.557
QSPI_SCL: F1.44 J1.15 | length 53.7
  TOP w0.05: v1(13.783,23.656) 14.289,24.162 ccw(c14.016,24.433) 14.401,24.433 14.401,28.301
  TOP w0.07: 14.401,28.301 14.401,28.386 F1.44@14.401,29.251
  BOTTOM w0.07: v1(13.783,23.656) ccw(c13.631,23.302) 13.631,23.687 12.639,23.687 ccw(c12.64,23.302) 12.368,23.575 11.994,23.201 ccw(c12.266,22.929) 11.881,22.929 11.881,15.108 ccw(c12.266,15.108) 11.993,14.837 13.699,13.131 ccw(c13.972,13.402) 13.972,13.017 35.205,13.017 cw(c35.205,12.632) 35.477,12.904 37.18,11.201 cw(c36.908,10.929) 37.293,10.929 37.293,2.956 37.293,2.695 ccw(c37.828,2.695) 37.45,2.316 37.516,2.25 cw(c37.296,2.031) 37.607,2.031 J1.15@37.607,0.557
QSPI_SDI0: F1.47 J1.11 | length 53.3
  TOP w0.05: v1(13.291,23.218) 13.46,23.049 ccw(c13.731,23.323) 13.731,22.938 14.244,22.938 ccw(c14.244,23.323) 14.515,23.05 14.679,23.214 ccw(c14.406,23.485) 14.791,23.485 14.791,28.301
  TOP w0.07: 14.791,28.301 F1.47@14.791,29.251
  BOTTOM w0.07: 13.291,15.365 ccw(c13.807,15.365) 13.442,15 ; 13.291,15.366 13.291,15.645 ccw(c12.906,15.658) 13.291,15.658 v1(13.291,23.218) ; 13.442,14.999 14.279,14.163 ccw(c14.503,14.386) 14.503,14.069 14.814,14.069 35.534,14.069 cw(c35.534,13.684) 35.807,13.957 38.263,11.5 cw(c37.991,11.228) 38.376,11.228 38.376,3.05 ccw(c38.761,3.05) 38.489,2.778 38.691,2.575 cw(c38.422,2.3) 38.807,2.3 J1.11@38.807,0.557
QSPI_SDI1: F1.43 J1.12 | length 52
  TOP w0.05: v1(12.869,23.244) 14.165,24.596 ccw(c13.886,24.862) 14.271,24.862 14.271,28.301
  TOP w0.07: 14.271,28.301 F1.43@14.271,29.251
  BOTTOM w0.07: v1(12.869,23.244) 12.869,15.677 12.869,15.315 ccw(c13.223,15.315) 12.973,15.065 14.13,13.908 ccw(c14.401,14.181) 14.401,13.796 35.488,13.796 cw(c35.49,13.411) 35.762,13.683 38.054,11.391 cw(c37.782,11.118) 38.167,11.118 38.167,2.808 ccw(c38.552,2.808) 38.28,2.536 38.392,2.424 cw(c38.122,2.15) 38.507,2.15 J1.12@38.507,0.907
QSPI_SDI2: F1.48 J1.13 | length 54.4
  TOP w0.05: v1(12.483,23.132) 12.607,22.974 ccw(c12.909,23.212) 12.909,22.827 14.397,22.827 ccw(c14.397,23.212) 14.669,22.939 14.809,23.079 ccw(c14.536,23.351) 14.921,23.351 14.921,28.301
  TOP w0.07: 14.921,28.301 F1.48@14.921,29.251
  BOTTOM w0.07: v1(12.483,23.132) 12.483,15.436 12.483,15.375 ccw(c12.888,15.375) 12.602,15.089 13.919,13.721 ccw(c14.197,13.987) 13.924,13.716 14.023,13.617 ccw(c14.27,13.863) 14.27,13.514 ; 14.271,13.514 35.418,13.514 cw(c35.419,13.129) 35.691,13.402 37.8,11.293 cw(c37.528,11.021) 37.913,11.021 37.913,2.71 ccw(c38.298,2.71) 38.025,2.437 38.093,2.37 cw(c37.822,2.097) 38.207,2.097 J1.13@38.207,0.557
QSPI_SDI3: F1.49 J1.14 | length 54.4
  TOP w0.05: v1(12.173,22.891) 12.355,22.731 ccw(c12.608,23.021) 12.608,22.636 14.445,22.636 ccw(c14.445,23.021) 14.716,22.748 14.939,22.971 ccw(c14.666,23.243) 15.051,23.243 15.051,28.301
  TOP w0.07: 15.051,28.301 15.051,28.618 F1.49@15.051,29.251
  BOTTOM w0.07: v1(12.173,22.891) 12.173,15.239 ccw(c12.618,15.239) 12.303,14.925 13.84,13.388 ccw(c14.111,13.661) 14.111,13.276 35.298,13.276 cw(c35.298,12.891) 35.57,13.163 37.515,11.218 cw(c37.243,10.946) 37.628,10.946 37.628,2.576 ccw(c38.013,2.576) 37.741,2.303 37.793,2.252 cw(c37.522,1.978) 37.907,1.978 J1.14@37.907,0.907
RESET: F1.32 J1.8 | length 54.6
  TOP w0.05: 12.841,28.301 12.869,28.095 cw(c12.661,28.066) 12.871,28.072 cw(c12.661,28.066) 12.871,28.061 ; 12.871,28.06 12.871,25.934 ccw(c13.368,25.934) 13.017,25.583 13.188,25.412 cw(c12.993,25.218) 13.268,25.218 v1(13.268,24.432)
  TOP w0.07: 12.841,28.301 F1.32@12.841,29.251
  BOTTOM w0.07: v1(13.268,24.432) 15.393,24.432 cw(c15.393,24.047) 15.665,24.32 15.697,24.287 cw(c15.425,24.015) 15.81,24.015 15.81,23.886 cw(c15.425,23.886) 15.697,23.613 15.692,23.608 cw(c15.42,23.88) 15.42,23.495 15.19,23.495 ccw(c15.19,23.256) 15.021,23.425 14.268,22.673 ccw(c14.541,22.401) 14.156,22.401 14.156,15.688 ccw(c14.541,15.688) 14.268,15.417 14.764,14.92 ccw(c15.036,15.193) 15.036,14.808 15.349,14.808 35.752,14.808 cw(c35.752,14.423) 36.024,14.695 38.854,11.866 cw(c38.581,11.594) 38.966,11.594 38.966,3.665 ccw(c39.351,3.665) 39.079,3.393 39.594,2.879 cw(c39.322,2.606) 39.707,2.606 J1.8@39.707,0.907
SWIRE: F1.57 U1.C3 | length 15.4
  TOP w0.05: v1(15.695,26.045) 15.695,27.463 cw(c16.08,27.463) 15.808,27.735 15.979,27.906 ccw(c15.706,28.178) 16.091,28.178 16.091,28.301
  TOP w0.07: 16.091,28.301 F1.57@16.091,29.251
  TOP w0.1: U1.C3@4.317,27.331 5.799,27.331 v1(5.809,27.342)
  BOTTOM w0.05: v1(5.809,27.342) ccw(c6.081,27.297) 5.806,27.299 5.806,27.158 ccw(c6.081,27.158) 5.886,26.964 5.9,26.949 ccw(c6.094,27.144) 6.094,26.869 9.934,26.869 cw(c9.934,26.594) 10.128,26.789 10.792,26.125 ccw(c10.985,26.32) 10.985,26.045 v1(15.695,26.045)
TE: F1.58 J1.10 | length 52.8
  TOP w0.05: v1(15.447,23.967) 15.888,24.408 ccw(c15.615,24.68) 16,24.68 16,26.561 cw(c16.385,26.561) 16,26.573 16,27.281 cw(c16.259,27.281) 16.076,27.464 ccw(c15.725,27.815) 16.221,27.815 16.221,28.301
  TOP w0.07: 16.221,28.301 F1.58@16.221,29.251
  BOTTOM w0.07: v1(15.447,23.967) 14.739,23.99 ccw(c14.727,23.605) 14.455,23.878 13.962,23.384 13.702,23.124 ccw(c13.974,22.852) 13.589,22.852 13.589,15.435 ccw(c13.974,15.435) 13.702,15.162 14.438,14.427 ccw(c14.71,14.699) 14.71,14.314 35.601,14.314 cw(c35.602,13.929) 35.874,14.201 38.47,11.606 cw(c38.197,11.334) 38.582,11.334 38.582,3.231 ccw(c38.967,3.231) 38.695,2.958 38.882,2.772 38.994,2.66 cw(c38.722,2.387) 39.107,2.387 J1.10@39.107,0.907
TP_INT: J1.3 J2.5 | length 54.4
  TOP w0.07: J2.5@8.481,2.797 7.612,2.797 cw(c7.612,3.182) 7.34,2.909 6.875,3.374 cw(c7.147,3.646) 6.762,3.646 6.762,10.212 cw(c7.147,10.212) 6.875,10.484 9.282,12.892 cw(c9.554,12.619) 9.554,13.004 34.111,13.004 cw(c34.111,12.619) 34.383,12.892 36.878,10.397 cw(c36.606,10.125) 36.991,10.125 36.991,4.302 ccw(c37.376,4.302) 37.103,4.03 39.615,1.518 ccw(c39.887,1.791) 39.887,1.406 40.701,1.406 ccw(c40.701,1.791) 40.973,1.519 41.079,1.624 ccw(c40.807,1.897) 41.192,1.897 v1(41.192,1.972)
  BOTTOM w0.1: v1(41.192,1.972) cw(c40.657,1.845) 41.207,1.845 J1.3@41.207,0.557
TP_RESET: J1.6 J2.2 | length 55.9
  TOP w0.07: J2.2@8.481,1.597 7.408,1.597 cw(c7.408,1.982) 7.136,1.709 6.008,2.837 6.007,2.838 cw(c6.28,3.109) 5.895,3.109 5.895,10.602 cw(c6.28,10.602) 6.008,10.874 8.619,13.485 cw(c8.891,13.213) 8.891,13.598 34.659,13.598 cw(c34.659,13.213) 34.932,13.485 37.773,10.644 cw(c37.501,10.372) 37.886,10.372 37.886,4.861 ccw(c38.271,4.861) 37.998,4.589 v1(40.301,2.286)
  BOTTOM w0.1: v1(40.301,2.286) cw(c39.752,2.261) 40.302,2.261 40.302,0.977 ccw(c40.852,0.979) 40.306,0.908 J1.6@40.307,0.907
TP_SCL: J1.5 J2.3 | length 55.4
  TOP w0.07: J2.3@8.481,1.997 7.417,1.997 cw(c7.417,2.382) 7.145,2.109 6.281,2.973 cw(c6.554,3.245) 6.169,3.245 6.169,10.483 cw(c6.554,10.483) 6.282,10.755 8.817,13.29 cw(c9.089,13.018) 9.089,13.403 34.457,13.403 cw(c34.457,13.018) 34.73,13.289 37.49,10.529 cw(c37.218,10.257) 37.603,10.257 37.603,4.61 ccw(c37.988,4.61) 37.715,4.338 39.96,2.093 ccw(c40.231,2.367) 40.231,1.982 v1(40.612,1.982)
  BOTTOM w0.1: J1.5@40.607,0.557 40.607,1.906 cw(c41.157,1.906) v1(40.612,1.982)
TP_SDA: J1.4 J2.4 | length 55.2
  TOP w0.07: J2.4@8.481,2.397 7.478,2.397 cw(c7.478,2.782) 7.205,2.509 6.565,3.15 6.564,3.151 cw(c6.837,3.422) 6.452,3.422 6.452,10.343 cw(c6.837,10.343) 6.565,10.615 9.045,13.095 cw(c9.317,12.823) 9.317,13.208 34.278,13.208 cw(c34.278,12.823) 34.55,13.095 37.161,10.484 cw(c36.889,10.212) 37.274,10.212 37.274,4.583 ccw(c37.896,4.583) 37.455,4.143 ccw(c37.896,4.583) 37.456,4.142 37.474,4.125 39.755,1.844 ccw(c40.163,2.252) 40.163,1.674 ; 40.164,1.674 40.531,1.674 ccw(c40.531,2.059) 40.803,1.787 ccw(c40.531,2.059) 40.916,2.059 40.916,2.278 v1(40.908,2.286)
  BOTTOM w0.1: J1.4@40.907,0.907 40.907,2.285 v1(40.908,2.286)
TP_VDD: J1.2 J2.1 | length 58
  TOP w0.2: J2.1@8.481,1.197 7.602,1.197 cw(c7.602,2.297) 6.823,1.521 5.906,2.437 cw(c6.684,3.215) 5.584,3.214 5.584,10.473 cw(c6.684,10.47) 5.905,11.247 8.226,13.567 cw(c9.002,12.788) 9.002,13.888 34.58,13.888 cw(c34.58,12.788) 35.357,13.567 37.892,11.032 cw(c37.115,10.254) 38.215,10.254 38.215,5.361 ccw(c39.315,5.361) 38.536,4.584 39.884,3.236 40.184,2.936 ccw(c40.825,3.572) 40.825,2.668 cw(c40.826,1.959) 41.327,2.461 v1(41.506,2.283)
  BOTTOM w0.2: v1(41.506,2.283) 41.507,2.282 J1.2@41.507,0.907
VBAT: C21.2 C22.1 J1.20 U1.A1 U1.A3 | length 63
  TOP w0.2: v1(2.326,29.027) 2.767,29.027 C21.2@2.982,29.03 ; C21.2@2.964,29.019 3.01,28.825 ccw(c4.081,29.076) U1.A1@3.517,28.132 ; U1.A3@4.317,28.132 4.318,28.13 4.962,28.13 v1(4.963,28.129) ; v1@4.963,28.132 5.181,28.91 ccw(c4.122,29.207) 5.207,29.029 C22.1@5.216,29.08 ; C22.1@5.277,29.21 5.282,29.205 5.795,29.205 v1(5.8,29.2)
  BOTTOM w0.2: v1(2.326,29.027) 3.076,29.027 ccw(c3.076,29.618) 3.478,29.185 ; 3.305,29.083 cw(c3.588,28.8) 3.478,29.185 ; v1(4.963,28.129) 4.963,26.93 ccw(c5.342,26.93) 5.342,26.552 9.837,26.552 cw(c9.837,26.352) 9.978,26.493 10.24,26.232 10.4,26.071 cw(c9.622,25.294) 10.722,25.294 10.722,14.633 ccw(c11.822,14.633) 11.044,13.855 12.843,12.056 ccw(c13.622,12.833) 13.622,11.733 34.557,11.733 cw(c34.557,10.633) 35.334,11.411 35.784,10.961 cw(c35.006,10.183) 36.106,10.185 36.107,10.116 ; v1(5.8,29.2) 3.588,29.2 ccw(c3.588,28.8) 3.478,29.185 ; J1.20@36.107,0.907 36.107,10.116
VCI: C18.1 C20.2 F1.19 F1.61 U1.D3 | length 29.2
  TOP w0.05: 16.611,28.301 16.611,26.904 ccw(c16.996,26.904) 16.672,26.697 v1(16.757,26.564)
  TOP w0.07: v1(11.068,26.564) ccw(c10.866,26.766) 11.151,26.766 F1.19@11.151,29.251 ; 16.611,28.301 F1.61@16.611,29.251
  TOP w0.1: C18.1@5.012,19.438 5.472,19.438 ccw(c5.472,19.988) 5.86,19.598 9.451,23.189 ccw(c9.063,23.578) 9.571,23.369 9.635,23.523 ccw(c9.126,23.733) 9.676,23.733 9.676,24.841 cw(c10.226,24.839) 9.823,25.213 10.877,26.349 11.015,26.498 ccw(c10.611,26.871) v1(11.068,26.564)
  TOP w0.2: U1.D3@4.317,26.931 4.829,26.931 5.63,26.931 ccw(c5.627,28.031) 6.172,27.076 v1(6.286,27.141) ; 4.83,26.93 cw(c3.91,26.328) 5.01,26.328 5.01,25.955 C20.2@5.01,25.75
  BOTTOM w0.2: v1(6.286,27.141) ccw(c6.344,28.239) 6.344,27.139 10.024,27.139 cw(c10.024,26.039) 10.801,26.817 11.054,26.564 v1(11.068,26.564) v1@16.743,26.564
VCI_EN: J1.18 U1.B3 | length 56
  TOP w0.1: U1.B3@4.317,27.731 ccw(c4.346,28.281) 4.346,27.731 5.479,27.731 cw(c5.477,27.181) v1(5.506,27.73)
  BOTTOM w0.07: v1(5.506,27.73) ccw(c5.878,27.629) 5.493,27.63 5.493,27.163 ccw(c5.878,27.163) 5.604,26.892 5.637,26.859 ccw(c5.909,27.132) 5.909,26.747 9.841,26.747 cw(c9.841,26.362) 10.113,26.634 11.099,25.648 cw(c10.548,25.095) 11.329,25.095 11.329,14.698 ccw(c11.714,14.698) 11.441,14.426 13.374,12.493 ccw(c13.647,12.765) 13.647,12.38 35.064,12.38 35.067,12.38 cw(c35.064,11.995) 35.337,12.267 36.594,11.01 cw(c36.321,10.738) 36.706,10.738 J1.18@36.707,0.907
VCL: C9.1 F1.25 | length 21.2
  TOP w0.05: C9.1@3.363,22.222 ccw(c3.998,22.222) 3.549,21.773 3.743,21.579 cw(c3.623,21.459) 3.793,21.459 3.793,20.934 ccw(c4.553,20.934) 4.015,20.397 cw(c3.647,20.284) 4.032,20.284 4.032,17.606 ccw(c4.417,17.606) 4.144,17.334 4.219,17.26 ccw(c4.49,17.533) 4.49,17.148 5.342,17.148 ccw(c5.342,17.533) 5.613,17.26 10.658,22.304 ; 10.659,22.305 ccw(c10.237,22.725) 10.832,22.725 10.832,24.503 ; 10.832,24.503 cw(c11.352,24.503) 10.985,24.871 11.818,25.704 ccw(c11.545,25.976) 11.93,25.976 11.931,28.301
  TOP w0.07: 11.931,28.301 11.931,28.386 F1.25@11.931,29.251
VDD: C10.1 F1.35 F1.59 | length 26.3
  TOP w0.05: C10.1@3.363,20.202 ccw(c3.957,20.202) 3.537,19.782 3.632,19.687 cw(c3.198,19.253) 3.812,19.254 cw(c3.198,19.253) 3.812,19.253 3.812,17.075 ccw(c4.087,17.075) 3.892,16.881 3.947,16.826 ccw(c4.141,17.021) 4.141,16.746 5.642,16.746 ccw(c5.642,17.021) 5.835,16.826 11.376,22.367 ccw(c11.181,22.561) 11.456,22.561 11.456,22.632 cw(c11.731,22.632) 11.536,22.826 12.057,23.347 cw(c12.251,23.151) 12.251,23.426 12.57,23.426 ccw(c12.57,23.701) 12.763,23.506 13.63,24.373 ccw(c13.435,24.567) 13.71,24.567 v1(13.71,27.132) ccw(c13.471,27.132) 13.64,27.301 13.356,27.585 cw(c13.659,27.887) 13.231,27.887 13.231,28.301
  TOP w0.07: 13.231,28.301 F1.35@13.231,29.251 ; v1(16.228,27.135) 16.308,27.289 ccw(c15.966,27.466) 16.351,27.466 16.351,28.301 F1.59@16.351,29.251
  BOTTOM w0.1: v1(13.71,27.132) v1@16.225,27.132
VDDI: C19.1 F1.29 F1.34 J1.17 | length 84.5
  TOP w0.05: C19.1@3.363,21.212 3.363,20.923 ccw(c3.638,20.923) 3.442,20.729 3.842,20.33 cw(c3.647,20.136) 3.922,20.136 3.922,17.269 ccw(c4.197,17.269) 4.002,17.076 4.056,17.022 ccw(c4.25,17.217) 4.25,16.942 5.524,16.942 ccw(c5.524,17.217) 5.718,17.022 11.085,22.389 ccw(c10.89,22.583) 11.165,22.583 11.165,22.721 cw(c11.44,22.721) 11.245,22.914 11.971,23.64 cw(c12.165,23.445) 12.165,23.72 12.188,23.72 ccw(c12.188,23.995) 12.381,23.8 12.854,24.272 ccw(c12.629,24.495) 12.945,24.495 12.945,25.23 ccw(c12.67,25.23) 12.865,25.424 12.681,25.609 cw(c12.875,25.803) 12.6,25.803 v1(12.6,26.882) 12.6,27.208 ccw(c12.356,27.208) 12.529,27.381 cw(c12.715,27.567) 12.451,27.567 12.451,28.301 ; 13.101,28.301 13.12,28.164 13.12,27.735 ccw(c13.421,27.735) 13.208,27.523 cw(c12.996,27.31) 13.296,27.31 v1(13.296,26.882)
  TOP w0.07: 12.451,28.301 F1.29@12.451,29.251 ; 13.101,28.301 F1.34@13.101,29.251
  BOTTOM w0.1: J1.17@37.007,0.557 37.007,1.657
  BOTTOM w0.15: v1(12.6,26.882) v1(13.296,26.882) ; v1@13.306,26.872 16.761,26.824 17.655,26.824 cw(c17.655,26.555) 17.924,26.555 17.924,26.101 cw(c17.608,26.101) 17.608,25.785 12.138,25.785 ccw(c12.138,25.224) 11.576,25.224 11.576,15.111 ccw(c12.401,15.111) 11.817,14.528 13.402,12.943 ccw(c13.986,13.526) 13.986,12.701 34.941,12.701 cw(c34.941,11.876) 35.524,12.46 36.765,11.219 cw(c36.182,10.635) 37.007,10.635 37.007,1.657
VGH: C16.1 F1.71 | length 27.3
  TOP w0.05: C16.1@1.623,17.651 1.828,17.466 1.849,17.441 cw(c1.554,17.194) 1.939,17.194 1.939,16.264 ccw(c2.324,16.264) 2.051,15.993 2.62,15.424 ccw(c2.891,15.697) 2.891,15.312 6.509,15.312 ccw(c6.509,15.697) 6.78,15.424 12.02,20.663 cw(c12.291,20.39) 12.291,20.775 15.197,20.775 ccw(c15.197,21.16) 15.468,20.887 18.059,23.478 ccw(c17.787,23.751) 18.172,23.735 18.179,23.906 ccw(c17.794,23.922) 18.179,23.922 18.179,26.927 ccw(c17.794,26.927) 18.067,27.198 18.032,27.233 cw(c18.301,27.508) 17.916,27.506 17.914,28.301
  TOP w0.07: F1.71@17.911,29.251 17.911,28.386 17.911,28.351 ccw(c18.006,28.351) 17.911,28.346 17.914,28.301
VGL: C17.1 F1.73 | length 26.9
  TOP w0.05: C17.1@1.623,16.742 1.623,16.221 ccw(c2.008,16.221) 1.735,15.95 2.432,15.253 ccw(c2.704,15.525) 2.704,15.14 6.68,15.14 ccw(c6.68,15.525) 6.951,15.253 12.073,20.374 cw(c12.344,20.101) 12.344,20.486 15.174,20.486 ccw(c15.174,20.871) 15.446,20.599 18.171,23.325 ccw(c17.899,23.597) 18.283,23.571 18.288,23.639 ccw(c17.904,23.665) 18.289,23.65 18.298,23.902 ccw(c17.804,23.922) 18.299,23.922 18.299,25.814 ccw(c17.914,25.814) 18.299,25.818 18.289,26.931 18.289,27.095 ccw(c18.06,27.095) 18.269,27.19 ccw(c18.06,27.095) 18.222,27.257 cw(c18.338,27.373) 18.174,27.373 18.174,28.301
  TOP w0.07: F1.73@18.171,29.251 18.171,28.351 ccw(c18.266,28.351) 18.171,28.346 18.174,28.301
VGS: F1.26 T10.1 | length 4.6
  TOP w0.05: T10.1@11.555,24.824 cw(c11.923,24.709) 11.65,24.98 11.949,25.28 ccw(c11.676,25.551) 12.061,25.551 12.061,28.301
  TOP w0.07: 12.061,28.301 12.061,28.386 F1.26@12.061,29.251
VINT: C3.1 F1.9 | length 8.6
  TOP w0.07: C3.1@5.012,22.725 5.233,22.725 ccw(c5.233,23.11) 5.505,22.838 9.522,26.855 ccw(c9.25,27.128) 9.627,27.047 9.698,27.378 ccw(c9.483,27.424) 9.7,27.391 9.764,27.813 cw(c9.982,27.781) 9.765,27.819 9.851,28.301 F1.9@9.851,29.251
VLOUT2: C15.1 F1.70 | length 27.6
  TOP w0.05: C15.1@1.633,18.571 1.828,18.376 1.939,18.262 cw(c1.664,17.993) 2.049,17.994 2.049,16.448 ccw(c2.434,16.448) 2.161,16.177 2.752,15.586 ccw(c3.024,15.858) 3.024,15.473 6.379,15.473 ccw(c6.379,15.858) 6.651,15.586 11.956,20.891 cw(c12.228,20.618) 12.228,21.003 15.057,21.003 ccw(c15.057,21.388) 15.329,21.116 17.946,23.733 ccw(c17.674,24.005) 18.059,24.005 18.059,26.877 ccw(c17.674,26.877) 17.946,27.149 17.899,27.197 cw(c18.171,27.469) 17.786,27.468 17.784,28.301
  TOP w0.07: F1.70@17.781,29.251 17.781,28.386 17.781,28.352 ccw(c18.006,28.351) 17.782,28.34 17.784,28.301
VLOUT3: C13.1 D1.2 F1.64 | length 28.8